# Altium PCB PCB1.PcbDoc
Units mil, origin at the board's own origin, x right, y up, seen from the top; angles counter-clockwise.
Board outline 6000 x 7984 mil, 2 copper layers (Top Layer, Bottom Layer); 25 components, 26 nets, 178 pads, 0 vias.
Unrouted connection lines stored in the file: 16.
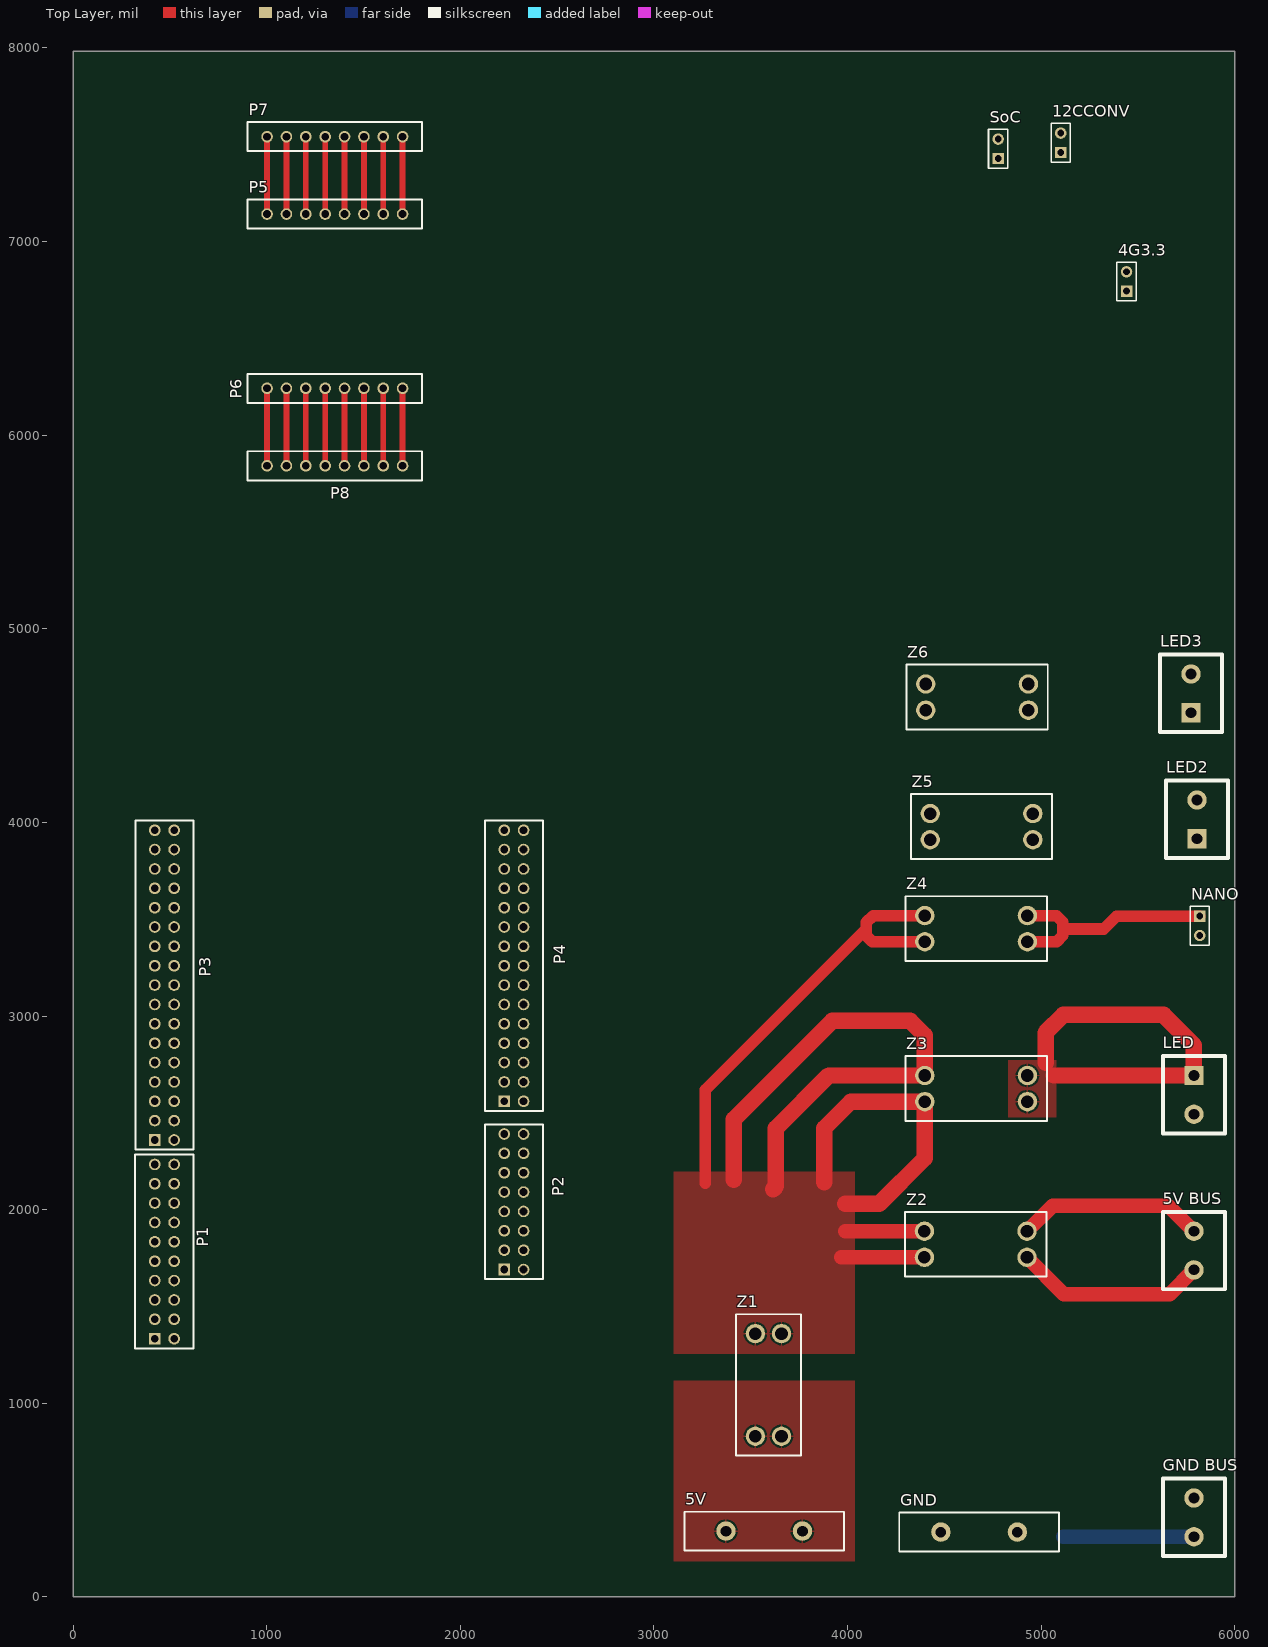
[diagram p0: Top Layer view]
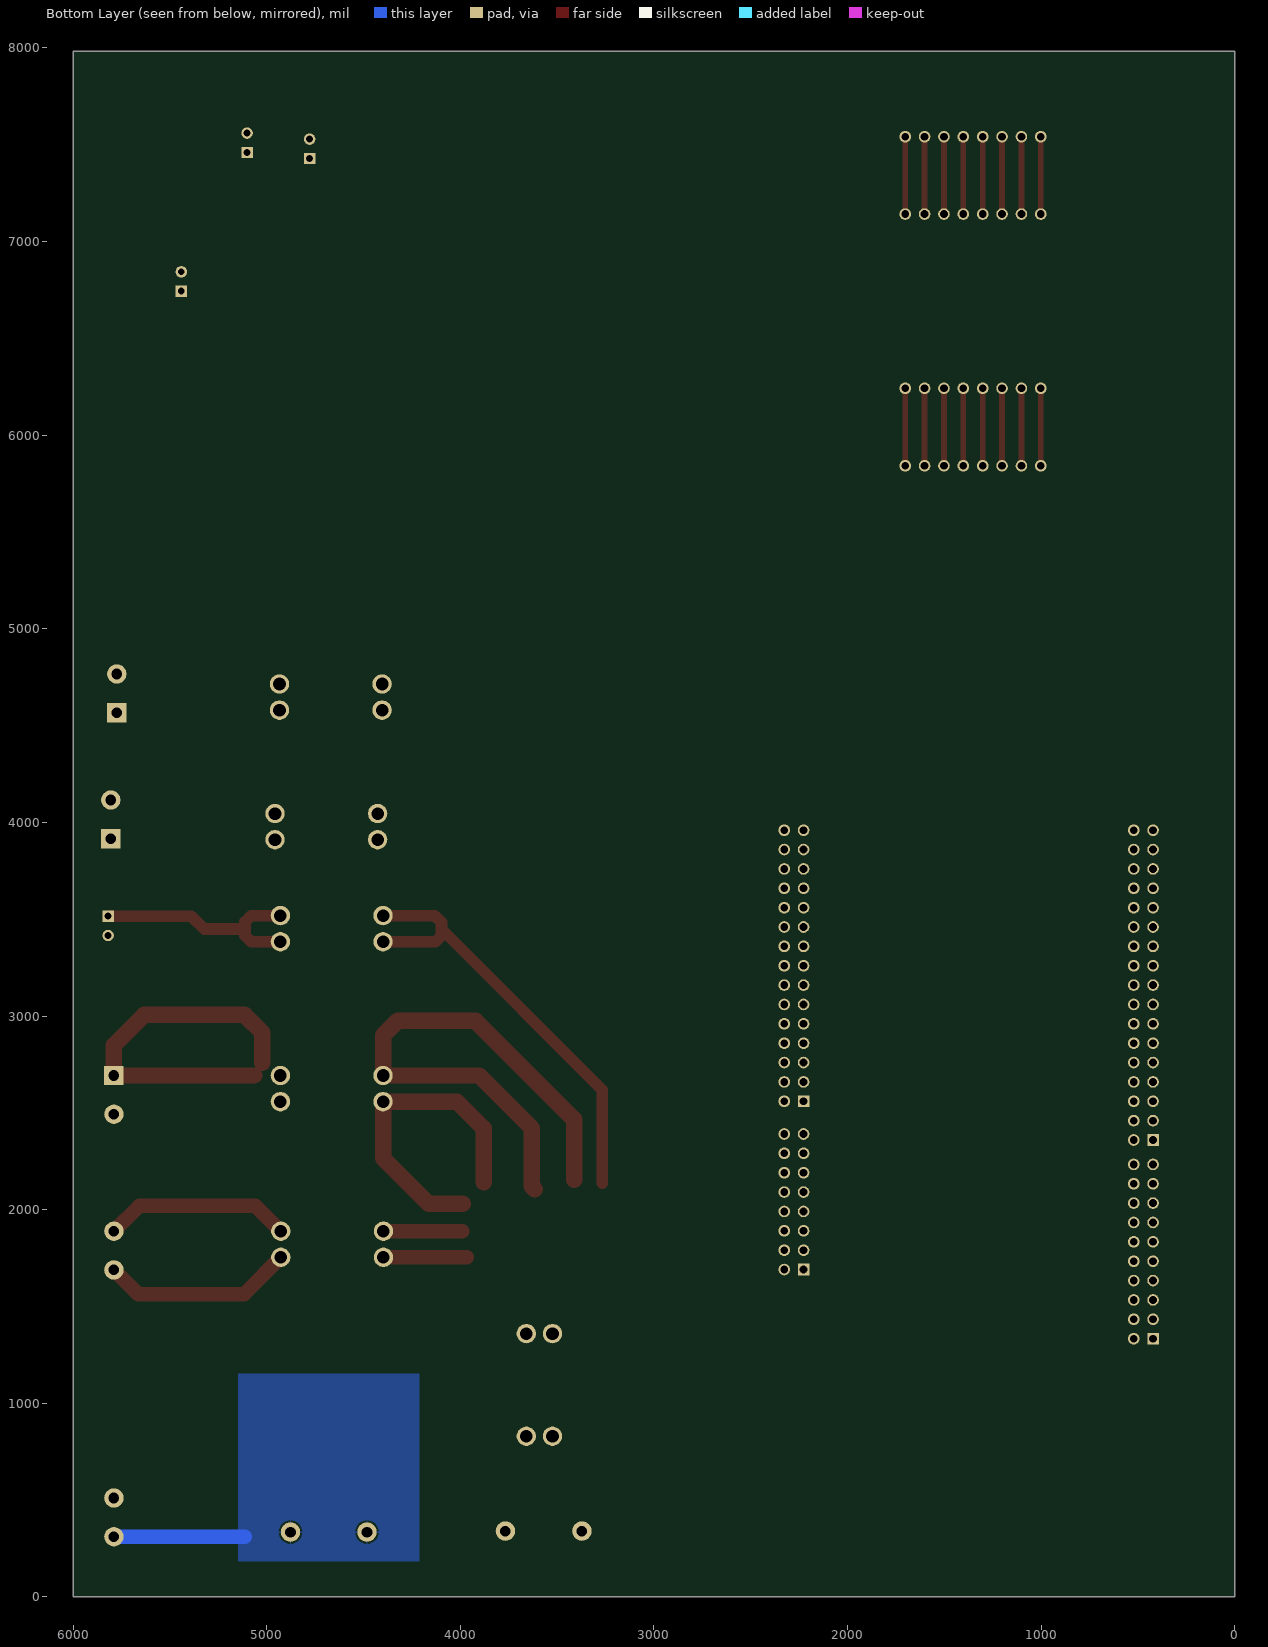
[diagram p1: Bottom Layer view, seen from below]

## Layer stack, top to bottom
Top Solder: solder mask 0.4, Solder Resist, Dk 3.5
Top Layer: signal copper 1.4
Dielectric 1: dielectric 12.6, FR-4, Dk 4.8
Bottom Layer: signal copper 1.4
Bottom Solder: solder mask 0.4, Solder Resist, Dk 3.5

## Board outline
0,0 6000,0 6000,7984 0,7984

## Design rules (kind name [scope] priority, off if disabled: settings)
Clearance [All] p1: gap=10 ignorepadtopadclearanceinfootprint=FALSE except(0: Arc-Hole Track-Hole SMDPad-Hole THPad-Hole Via-Hole Fill-Hole Poly-Hole Region-Hole Text-Hole)
PolygonConnect [All] p1: connectstyle=Relief reliefconductorwidth=10 reliefentries=4 polygonreliefangle="90 Angle" airgapwidth=10
RoutingVias [All] p1: holewidth=28 width=50 viastyle="Through Hole" minholewidth=28 minwidth=50 maxholewidth=28 maxwidth=50
SolderMaskExpansion [All] p1: expansion=4
Width [All] p1: maxlimit=200 minlimit=10 preferedwidth=10 minimp=50.000000 maximp=50.000000 favimp=50.000000
30 further rules are at their usual default settings.

## Components (designator, comment, footprint, x,y, rotation, side; value= is the part's Value field where it differs from the comment)
4G3.3 "Header 2" HDR1X2 5441,6744 r90 top
5V "HDR1" HDR1 3372,240 r90 top
"5V BUS" "Header 2" HDR2#1 5789,1589 r90 top
12CCONV "Header 2" HDR1X2 5101,7460 r90 top
GND "HDR1" HDR1 4482,235 r90 top
"GND BUS" "Header 2" HDR2#1 5789,211 r90 top
LED "Header 2" HDR2#2 5789,2793 r270 top
LED2 "Header 2" HDR2#2 5805,3816 r90 top
LED3 "Header 2" HDR2#2 5774,4467 r90 top
NANO "Header 2" HDR1X2 5819,3516 r270 top
P1 "Header 10X2" hdr10x2 422,1234 r90 top
P2 "Header 8X2" hdr8x2 2227,1591 r90 top
P3 "Header 17X2" hdr17x2 422,2260 r90 top
P4 "Header 15X2" hdr15x2 2227,2460 r90 top
P5 "Header 8" HDR8 1802,7142 r180 top
P6 "Header 8" HDR8 902,6242 r0 top
P7 "Header 8" HDR8 902,7542 r0 top
P8 "Header 8" HDR8 1802,5842 r180 top
SoC "Header 2" HDR1X2 4778,7429 r90 top
Z1 "Zekering 30A" Zekering 3524,730 r90 top
Z2 "Zekering 5A" Zekering 4297,1889 r0 top
Z3 "Zekering 4A" Zekering 4299,2693 r0 top
Z4 "Zekering 4A" Zekering 4299,3519 r0 top
Z5 "Zekering" Zekering 5057,3911 r180 top
Z6 "Zekering" Zekering 5034,4580 r180 top

## Footprints (in the part's own frame and the unit in brackets; to place one, negate y for a bottom-side part, rotate by r counter-clockwise, add the part's x,y. Pads: shape width x height; smd on the part's side, far side on the other; paste and mask are expansions set on the pad)
HDR1 [mil]
  round 100 hole 55: 1(100,0) 2(100,-395)
  silkscreen extent 0,-610 200,215
HDR1X2 [mm] "Connector; Header; 2 Position"
  rect 1.5x1.5 hole 0.9: 1(0,0)
  round 1.5 hole 0.9: 2(2.54,0)
  silkscreen extent -1.27,-1.27 3.81,1.27
HDR2#1 [mil]
  round 100 hole 55: 1(100,0) 2(300,0)
  silkscreen extent 0,-160 400,160
HDR2#2 [mil]
  rect 100x100 hole 55: 1(100,0)
  round 100 hole 55: 2(300,0)
  silkscreen extent 0,-160 400,160
HDR8 [mil]
  round 60 hole 40: 1(100,0) 2(200,0) 3(300,0) 4(400,0) 5(500,0) 6(600,0) 7(700,0) 8(800,0)
  silkscreen extent 0,-75 900,75
hdr8x2 [mil]
  rect 60x60 hole 40: 1(100,0)
  round 60 hole 40: 2(100,-100) 3(200,0) 4(200,-100) 5(300,0) 6(300,-100) 7(400,0) 8(400,-100) 9(500,0) 10(500,-100) 11(600,0) 12(600,-100) 13(700,0) 14(700,-100) 15(800,0) 16(800,-100)
  silkscreen extent 50,-200 850,100
hdr10x2 [mil]
  rect 60x60 hole 40: 1(100,0)
  round 60 hole 40: 2(100,-100) 3(200,0) 4(200,-100) 5(300,0) 6(300,-100) 7(400,0) 8(400,-100) 9(500,0) 10(500,-100) 11(600,0) 12(600,-100) 13(700,0) 14(700,-100) 15(800,0) 16(800,-100) 17(900,0) 18(900,-100) 19(1000,0) 20(1000,-100)
  silkscreen extent 50,-200 1050,101
hdr15x2 [mil]
  rect 60x60 hole 40: 1(100,0)
  round 60 hole 40: 2(100,-100) 3(200,0) 4(200,-100) 5(300,0) 6(300,-100) 7(400,0) 8(400,-100) 9(500,0) 10(500,-100) 11(600,0) 12(600,-100) 13(700,0) 14(700,-100) 15(800,0) 16(800,-100) 17(900,0) 18(900,-100) 19(1000,0) 20(1000,-100) 21(1100,0) 22(1100,-100) 23(1200,0) 24(1200,-100) 25(1300,0) 26(1300,-100) 27(1400,0) 28(1400,-100) 29(1500,0) 30(1500,-100)
  silkscreen extent 50,-200 1550,100
hdr17x2 [mil]
  rect 60x60 hole 40: 1(100,0)
  round 60 hole 40: 2(100,-100) 3(200,0) 4(200,-100) 5(300,0) 6(300,-100) 7(400,0) 8(400,-100) 9(500,0) 10(500,-100) 11(600,0) 12(600,-100) 13(700,0) 14(700,-100) 15(800,0) 16(800,-100) 17(900,0) 18(900,-100) 19(1000,0) 20(1000,-100) 21(1100,0) 22(1100,-100) 23(1200,0) 24(1200,-100) 25(1300,0) 26(1300,-100) 27(1400,0) 28(1400,-100) 29(1500,0) 30(1500,-100) 31(1600,0) 32(1600,-100) 33(1700,0) 34(1700,-100)
  silkscreen extent 50,-200 1750,100
Zekering [mil]
  round 100 hole 65: 1(100,0) 2(100,-135) 3(630,0) 4(630,-135)
  silkscreen extent 0,-235 730,100

## Part data
4G3.3 "5V BUS" 12CCONV "GND BUS" LED LED2 LED3 NANO SoC: "Header, 2-Pin", LatestRevisionDate=17-Jul-2002, LatestRevisionNote="Re-released for DXP Platform.", Publisher="Altium Limited"
P1: "Header, 10-Pin, Dual row", LatestRevisionDate=17-Jul-2002, LatestRevisionNote="Re-released for DXP Platform.", Publisher="Altium Limited"
P2: "Header, 8-Pin, Dual row", LatestRevisionDate=17-Jul-2002, LatestRevisionNote="Re-released for DXP Platform.", Publisher="Altium Limited"
P3: "Header, 17-Pin, Dual row", LatestRevisionDate=17-Jul-2002, LatestRevisionNote="Re-released for DXP Platform.", Publisher="Altium Limited"
P4: "Header, 15-Pin, Dual row", LatestRevisionDate=17-Jul-2002, LatestRevisionNote="Re-released for DXP Platform.", Publisher="Altium Limited"
P5 P6 P7 P8: "Header, 8-Pin", LatestRevisionDate=17-Jul-2002, LatestRevisionNote="Re-released for DXP Platform.", Publisher="Altium Limited"
Z1 Z2 Z3 Z4: library part Zekering

## Nets (pads, with @x,y where several pads share a name; then routed paths per layer and width w, separated by ;. In a path a pad name is that pad's centre, name@x,y a point inside that pad or via, vN(x,y) a via of type N, cw(c..) or ccw(c..) an arc to the next point about the centre after c; other vN are vias at no path point)
"Net5V BUS_1": "5V BUS.1" "5V BUS.2" Z2.3 Z2.4 | length 1963.8
  Top Layer w75: Z2.4 5117,1564 5664,1564 5789,1689 ; Z2.3 5059,2021 5657,2021 5789,1889
Net5V_1: 5V.1 5V.2 Z1.1 Z1.2
Net12CCONV_1: 12CCONV.1 SoC.1
Net12CCONV_2: 12CCONV.2 SoC.2
NetGND_1: "GND BUS.1" "GND BUS.2" GND.1 GND.2 LED2.2 LED3.2 LED.2 NANO.2 | length 681.7
  Bottom Layer w10: 5109,307 5113,311
  Bottom Layer w75: 5113,311 5789,311
NetLED2_1: LED2.1 Z5.3 Z5.4
NetLED3_1: LED3.1 Z6.3 Z6.4
NetLED_1: LED.1 Z3.3 Z3.4 | length 1903.7
  Top Layer w85: 5023,2760 5023,2915 5114,3006 5632,3006 5789,2849 LED.1 5065,2693
NetNANO_1: NANO.1 Z4.3 Z4.4 | length 1197.3
  Top Layer w60: Z4.4 5080,3384 5112,3416 5112,3450 ; Z4.3 5079,3519 5112,3486 5112,3450 ; NANO.1 5389,3516 5323,3450 5112,3450
NetP5_1: P5.1 P7.8 | length 400
  Top Layer w30: P5.1 P7.8
NetP5_2: P5.2 P7.7 | length 400
  Top Layer w30: P5.2 P7.7
NetP5_3: P5.3 P7.6 | length 400
  Top Layer w30: P5.3 P7.6
NetP5_4: P5.4 P7.5 | length 400
  Top Layer w30: P5.4 P7.5
NetP5_5: P5.5 P7.4 | length 400
  Top Layer w30: P5.5 P7.4
NetP5_6: P5.6 P7.3 | length 400
  Top Layer w30: P5.6 P7.3
NetP5_7: P5.7 P7.2 | length 400
  Top Layer w30: P5.7 P7.2
NetP5_8: P5.8 P7.1 | length 400
  Top Layer w30: P5.8 P7.1
NetP6_1: P6.1 P8.8 | length 400
  Top Layer w30: P8.8 P6.1
NetP6_2: P6.2 P8.7 | length 400
  Top Layer w30: P8.7 P6.2
NetP6_3: P6.3 P8.6 | length 400
  Top Layer w30: P8.6 P6.3
NetP6_4: P6.4 P8.5 | length 400
  Top Layer w30: P8.5 P6.4
NetP6_5: P6.5 P8.4 | length 400
  Top Layer w30: P8.4 P6.5
NetP6_6: P6.6 P8.3 | length 400
  Top Layer w30: P8.3 P6.6
NetP6_7: P6.7 P8.2 | length 400
  Top Layer w30: P8.2 P6.7
NetP6_8: P6.8 P8.1 | length 400
  Top Layer w30: P8.1 P6.8
NetZ1_3: Z1.3 Z1.4 Z2.1 Z2.2 Z3.1 Z3.2 Z4.1 Z4.2 Z5.1 Z5.2 Z6.1 Z6.2 | length 7811.4
  Top Layer w10: 3408,2150 3412.14,2154.14
  Top Layer w60: 3266,2136 3266,2618.5 4097,3449.5 ; Z4.2 4128,3384 4097,3415 4097,3449.5 ; Z4.1 4132,3519 4097,3484 4097,3449.5
  Top Layer w75: 3967,1754 Z2.2 ; 3989,1889 Z2.1
  Top Layer w85: 3412.14,2154.14 3412.14,2466.14 3921,2975 4324,2975 4399,2900 Z3.1 3902,2693 3630,2421 3630,2120 3615,2105 ; 3880,2141 3880,2421 4017,2558 Z3.2 4399,2266 4163,2030 3988,2030 3987,2031
pads on no net: 4G3.3.1 4G3.3.2 P1.1 P1.2 P1.3 P1.4 P1.5 P1.6 P1.7 P1.8 P1.9 P1.10 P1.11 P1.12 P1.13 P1.14 P1.15 P1.16 P1.17 P1.18 P1.19 P1.20 P2.1 P2.2 P2.3 P2.4 P2.5 P2.6 P2.7 P2.8 P2.9 P2.10 P2.11 P2.12 P2.13 P2.14 P2.15 P2.16 P3.1 P3.2 P3.3 P3.4 P3.5 P3.6 P3.7 P3.8 P3.9 P3.10 P3.11 P3.12 P3.13 P3.14 P3.15 P3.16 P3.17 P3.18 P3.19 P3.20 P3.21 P3.22 P3.23 P3.24 P3.25 P3.26 P3.27 P3.28 P3.29 P3.30 P3.31 P3.32 P3.33 P3.34 P4.1 P4.2 P4.3 P4.4 P4.5 P4.6 P4.7 P4.8 P4.9 P4.10 P4.11 P4.12 P4.13 P4.14 P4.15 P4.16 P4.17 P4.18 P4.19 P4.20 P4.21 P4.22 P4.23 P4.24 P4.25 P4.26 P4.27 P4.28 P4.29 P4.30

## Polygon pours and split planes (outlines as drawn)
NetZ1_3 on Top Layer "Top Layer-NetZ1_3" (solid, pour order 40): 3102,1257 4037,1257 4037,2195 3102,2195
NetLED_1 on Top Layer "Top Layer-NetLED_1" (solid, pour order 38): 4829,2478 5079,2478 5079,2773 4829,2773
no net on Top Layer "Top Layer-No Net" (solid, pour order 36): 4335,145
no net on Top Layer "Top Layer-No Net 1" (solid, pour order 28): 4327,609
Net5V_1 on Top Layer "Top Layer-Net5V_1" (solid, pour order 26): 4037,185 3102,185 3102,1117 4037,1117
NetGND_1 on Bottom Layer "Bottom Layer-NetGND_1" (solid, pour order 34): 4212,185 5147,185 5147,1153 4212,1153